# EAGLE board rtkgpio-ps (EAGLE 7.7.0)
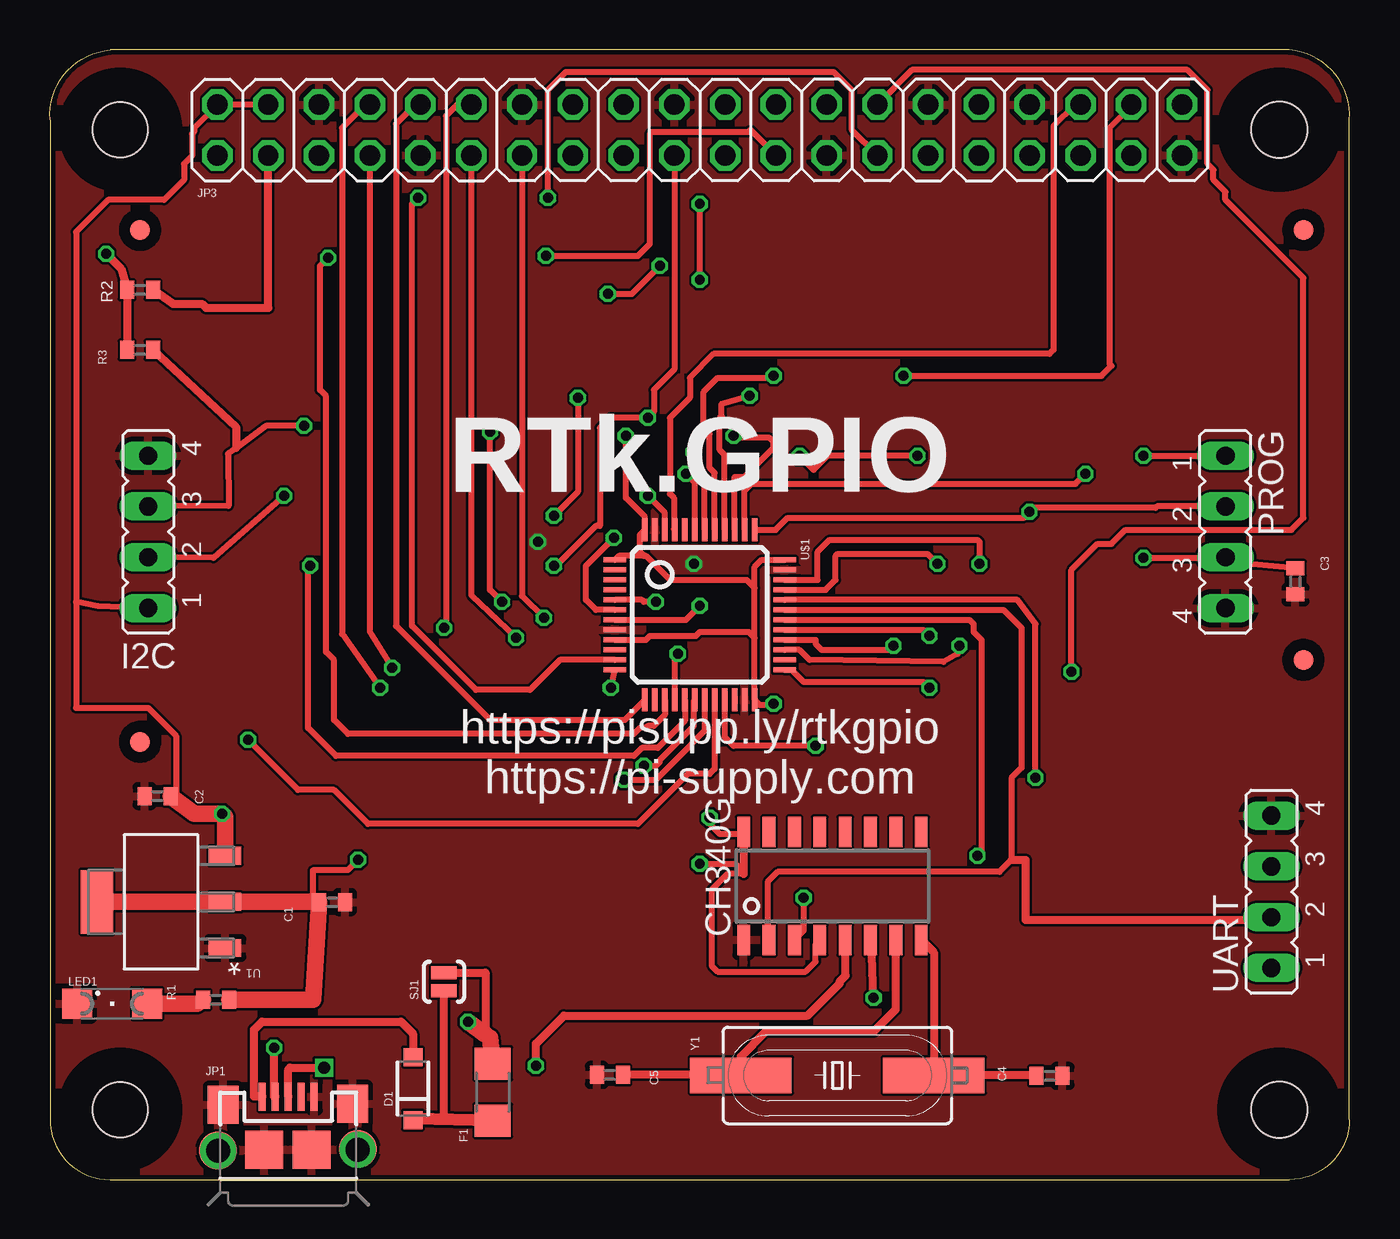
[diagram p0: board, top side]
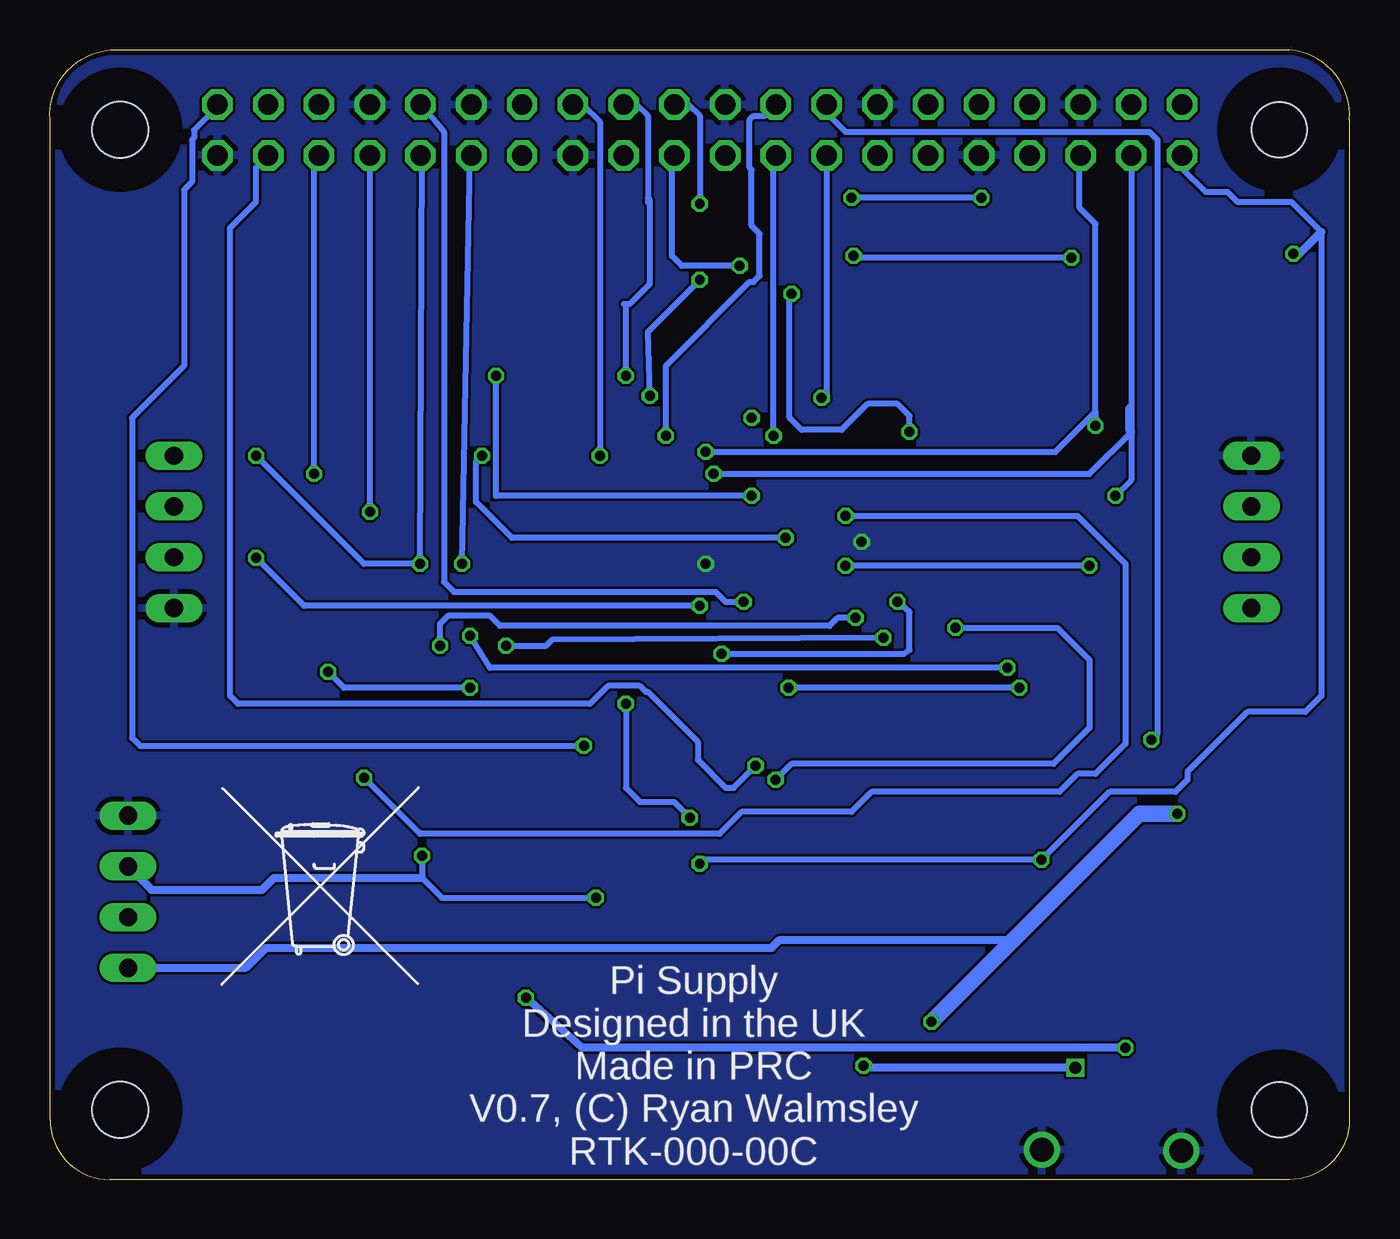
[diagram p1: board, bottom side, seen from below]

Size 65.02 x 56.5 mm. Coordinates in mm from the lower left corner, seen from the top.
Outline: 3.01,0 62.01,0 arc90 65.01,3 65.01,53 arc90 62.01,56.5 3.01,56.5 arc90 0.01,53 0.01,3 arc90 3.01,0
Copper layers (1*16): Top 0.035mm / dielectric 1.5mm / Bottom 0.035mm
Design rules "dirt_cheap_dirty_boards.v1": minimum track width 5mil, minimum drill 12mil, track to track 5mil, track to pad 5mil, pad to pad 5mil, via to via 5mil, smd to smd 0mil, copper to edge 10mil, drill to drill 10mil, minimum pad ring 10mil, minimum via ring 6mil, stop-mask expansion 2mil, vias tented up to drill 25mil, thermal gap 10mil
Holes 2.8 mm at 61.51,3.5 61.51,52.5
Holes 2.75 mm at 3.51,52.5 3.51,3.5
tRestrict: area 2,1.9 to 5.1,5; area 2,51 to 5.1,54; area 60,51 to 63.1,54; area 60,1.9 to 63.1,5; area 2,1.9 to 5.1,5
bRestrict: area 2,51 to 5.1,54; area 60,51 to 63.1,54; area 60,1.9 to 63.1,5; area 2,1.8 to 5.1,5

## Footprints (pad centres in the part's own frame; a part is rotated, then mirrored left to right if it is on the bottom)
C0402 = smd 0.7 x 0.9: 1 -0.65,0; 2 0.65,0
SOD-123 = smd 0.9 x 0.95: A 1.575,0; C -1.575,0
R1206 = smd 1.6 x 1.803: 1 -1.422,0; 2 1.422,0
JP4 = drill 0.914 long: 1 -3.81,0; 2 -1.27,0; 3 1.27,0; 4 3.81,0
USB-MICROB = smd 0.35 x 1.4: D+ 0,2.65; D- -0.65,2.65; GND 1.3,2.65; ID 0.65,2.65; VBUS -1.3,2.65 | smd 1.546 x 1.9: MT1 -3.251,2.235; MT2 3.226,2.286 | smd 1.9 x 1.9: P$1 -1.194,0; P$2 1.168,0; P$5 -3.505,-0.051; P$6 3.48,0.025 | drill 1.2 pad 1.6: P$3 -3.505,-0.051; P$4 3.48,0
2X20 = drill 1.016 octagon: 1 -24.13,-1.27; 2 -24.13,1.27; 3 -21.59,-1.27; 4 -21.59,1.27; 5 -19.05,-1.27; 6 -19.05,1.27; 7 -16.51,-1.27; 8 -16.51,1.27; 9 -13.97,-1.27; 10 -13.97,1.27; 11 -11.43,-1.27; 12 -11.43,1.27; 13 -8.89,-1.27; 14 -8.89,1.27; 15 -6.35,-1.27; 16 -6.35,1.27; 17 -3.81,-1.27; 18 -3.81,1.27; 19 -1.27,-1.27; 20 -1.27,1.27; 21 1.27,-1.27; 22 1.27,1.27; 23 3.81,-1.27; 24 3.81,1.27; 25 6.35,-1.27; 26 6.35,1.27; 27 8.89,-1.27; 28 8.89,1.27; 29 11.43,-1.27; 30 11.43,1.27; 31 13.97,-1.27; 32 13.97,1.27; 33 16.51,-1.27; 34 16.51,1.27; 35 19.05,-1.27; 36 19.05,1.27; 37 21.59,-1.27; 38 21.59,1.27; 39 24.13,-1.27; 40 24.13,1.27
SML1206 = smd 1.5 x 1.5: A 1.75,0; C -1.75,0
R0402 = smd 0.7 x 0.9: 1 -0.65,0; 2 0.65,0
SJ_2S-NO = smd 0.635 x 1.27: 1 -0.45,0; 2 0.45,0
SOT230P700X180-4N = smd 1.626 x 0.889: 1 -3.2,2.311; 2 -3.2,0; 3 -3.2,-2.311 | smd 1.626 x 3.175: 4 3.2,0
LQFP-48 = smd 0.254 x 1.143: 1 -2.75,-4.25; 2 -2.25,-4.25; 3 -1.75,-4.25; 4 -1.25,-4.25; 5 -0.75,-4.25; 6 -0.25,-4.25; 7 0.25,-4.25; 8 0.75,-4.25; 9 1.25,-4.25; 10 1.75,-4.25; 11 2.25,-4.25; 12 2.75,-4.25; 25 2.75,4.25; 26 2.25,4.25; 27 1.75,4.25; 28 1.25,4.25; 29 0.75,4.25; 30 0.25,4.25; 31 -0.25,4.25; 32 -0.75,4.25; 33 -1.25,4.25; 34 -1.75,4.25; 35 -2.25,4.25; 36 -2.75,4.25 | smd 1.143 x 0.254: 13 4.25,-2.75; 14 4.25,-2.25; 15 4.25,-1.75; 16 4.25,-1.25; 17 4.25,-0.75; 18 4.25,-0.25; 19 4.25,0.25; 20 4.25,0.75; 21 4.25,1.25; 22 4.25,1.75; 23 4.25,2.25; 24 4.25,2.75; 37 -4.25,2.75; 38 -4.25,2.25; 39 -4.25,1.75; 40 -4.25,1.25; 41 -4.25,0.75; 42 -4.25,0.25; 43 -4.25,-0.25; 44 -4.25,-0.75; 45 -4.25,-1.25; 46 -4.25,-1.75; 47 -4.25,-2.25; 48 -4.25,-2.75
FIDUCIAL-1MM = smd 1 x 1: 1 0,0
SOIC16 = smd 0.635 x 1.524: 1 -4.445,-2.695; 2 -3.175,-2.695; 3 -1.905,-2.695; 4 -0.635,-2.695; 5 0.635,-2.695; 6 1.905,-2.695; 7 3.175,-2.695; 8 4.445,-2.695; 9 4.445,2.695; 10 3.175,2.695; 11 1.905,2.695; 12 0.635,2.695; 13 -0.635,2.695; 14 -1.905,2.695; 15 -3.175,2.695; 16 -4.445,2.695
SM49 = smd 5.08 x 1.778: 1 -4.826,0; 2 4.826,0

## Placement (x,y rotation side)
C1  100nF  [C0402]  14.11,13.88 0 top
C2  100nF  [C0402]  5.38,19.18 180 top
C3  100nF  [C0402]  62.32,29.92 270 top
C4  22pF  [C0402]  50.01,5.19 0 top
C5  22pF  [C0402]  28.01,5.24 180 top
D1  B0520LW  [SOD-123]  18.16,4.55 90 top
F1  MC36211  [R1206]  22.15,4.38 90 top
I2C  [JP4]  4.91,32.4 90 top
JP1  USB-MICROB  [USB-MICROB]  11.92,1.51 0 top
JP3  [2X20]  32.51,52.5 0 top
LED1  Red  [SML1206]  3.11,8.8 0 top
PROG  [JP4]  58.81,32.4 270 top
R1  330  [R0402]  8.31,9 180 top
R2  1R8  [R0402]  4.51,44.5 0 top
R3  1R8  [R0402]  4.51,41.5 0 top
SJ1  FBP  [SJ_2S-NO]  19.71,9.9 90 top
U1  LD1117S33CTR  [SOT230P700X180-4N]  5.56,13.89 180 top
U$1  STM32F0X  [LQFP-48]  32.51,28.25 270 top
U$2  [TONNE_10.00]  51.61,12.7 0 bottom
U$5  FIDUCIAL1MM  [FIDUCIAL-1MM]  62.71,47.5 0 top
U$6  CH340G  [SOIC16]  39.15,14.68 0 top
U$7  FIDUCIAL1MM  [FIDUCIAL-1MM]  62.71,26 0 top
U$8  FIDUCIAL1MM  [FIDUCIAL-1MM]  4.51,21.9 0 top
U$9  FIDUCIAL1MM  [FIDUCIAL-1MM]  4.51,47.5 0 top
UART  [JP4]  61.11,14.4 90 top
Y1  12Mhz  [SM49]  39.39,5.22 0 top

## Library data of the parts
C1-C5 R1-R3 = resistor
D1 = SparkFun-DiscreteSemi
F1 = adafruit
I2C PROG UART = jumper
JP1 = pimoroni2
JP3 = pinhead
LED1 = led
SJ1 = SparkFun-Retired
U1 = ryanteck; MPN: LD1117S33CTR; OC_FARNELL: 2253482; OC_NEWARK: 89K0626; PACKAGE: SOT223-3; SUPPLIER: STMicroelectronics
U$1 = ryanteck
U$2 = logo
U$5 U$7-U$9 = pimoroni
U$6 = usb-serial
Y1 = adafruit; OC_FARNELL: unknown; OC_NEWARK: unknown

## Nets
+3V3: C1.1 JP3.1 JP3.17 R1.1 R2.1 R3.1 U1.2 U1.4 U$1.1 U$1.9 U$1.24 U$1.36 U$1.48 U$6.4 U$6.16
FRXD: U$1.30 U$6.3 UART.3
FTXD: U$1.31 U$6.2 UART.2
GND: C1.2 C2.2 C3.2 C4.2 C5.2 I2C.4 JP1.GND JP1.MT1 JP1.MT2 JP1.P$1 JP1.P$2 JP1.P$3 JP1.P$4 JP3.6 JP3.9 JP3.14 JP3.20 JP3.25 JP3.30 JP3.34 JP3.39 LED1.C PROG.4 U1.1 U$1.8 U$1.23 U$1.35 U$1.47 U$6.1 UART.4
GPIO0: JP3.27 U$1.11
GPIO1: JP3.28 U$1.25
GPIO2: I2C.2 JP3.3 R2.2 U$1.43
GPIO3: I2C.3 JP3.5 R3.2 U$1.42
GPIO4: JP3.7 U$1.29
GPIO5: JP3.29 U$1.33
GPIO6: JP3.31 PROG.1 U$1.34
GPIO7: JP3.26 U$1.6
GPIO8: JP3.24 U$1.41
GPIO9: JP3.21 U$1.16
GPIO10: JP3.19 U$1.17
GPIO11: JP3.23 U$1.15
GPIO12: JP3.32 U$1.5
GPIO13: JP3.33 PROG.2 U$1.37
GPIO14: JP3.8 U$1.12
GPIO15: JP3.10 U$1.13
GPIO16: JP3.36 U$1.45
GPIO17: JP3.11 U$1.28
GPIO18: JP3.12 U$1.19
GPIO19: JP3.35 U$1.38
GPIO20: JP3.38 U$1.46
GPIO21: JP3.40 U$1.21
GPIO22: JP3.15 U$1.32
GPIO23: JP3.16 U$1.20
GPIO24: JP3.18 U$1.39
GPIO25: JP3.22 U$1.40
GPIO26: JP3.37 U$1.18
GPIO27: JP3.13 U$1.27
N$1: C5.1 U$6.7 Y1.1
N$4: C4.1 U$6.8 Y1.2
N$5: LED1.A R1.2
N$6: U$1.26
N$8: U$1.22
N$10: D1.C F1.1 SJ1.1
N$11: D1.A JP1.VBUS
N$16: U$1.14
RST: C3.1 PROG.3 U$1.7
USBDM: JP1.D- U$6.6
USBDP: JP1.D+ U$6.5
VCC: C2.1 F1.2 I2C.1 JP3.2 JP3.4 SJ1.2 U1.3 UART.1

## Tracks (layer width: path | path; a pad name or v marks a point on that pad's centre or on a via)
+3V3  (via drill 0.5)
  Top 0.305: 35.26,27.1 U$1.24 35.51,23.75 36.16,23.75 v36.21,23.8 | 35.26,27.1 35.26,29.6 | 35.26,29.6 35.26,30.65 35.61,31 U$1.36 | 29.71,31.2 28.46,31.2 U$1.1 | U$1.9 29.81,27 30.01,27.2 32.31,27.2 32.51,27.4 34.96,27.4 35.26,27.1 | 13.16,13.89 13.16,15.46 13.21,15.5 14.91,15.5 v15.41,16 | v32.51,15.8 34.31,15.8 34.71,15.4 | v33.01,18.1 33.01,17.8 33.51,17.3 34.63,17.3 U$6.16 | 34.71,15.3 33.91,15.3 33.11,14.5 33.11,10.7 33.41,10.4 37.81,10.4 38.31,10.9 38.31,11.78 U$6.4 | v28.81,37.2 28.81,34.1 29.76,33.15 U$1.48 29.51,32.25 29.51,31.4 29.71,31.2 | 35.26,29.6 34.86,30 31.01,30 29.81,31.2 29.71,31.2
  Top 0.406: U$6.16 34.71,15.4 34.71,15.3 | v2.81,46.3 3.56,45.55 R2.1 R3.1
  Top 0.813: U1.4 U1.2 13.16,13.89 C1.1 13.16,9 R1.1
  Bottom 0.305: v32.51,15.8 32.31,16 v15.41,16 12.01,19.4 8.71,19.4 8.11,20 8.11,20.4 5.11,23.4 2.21,23.4 1.41,24.2 1.41,47.4 2.91,48.9 5.61,48.9 6.11,49.4 7.21,49.4 8.38,50.57 JP3.1 | v36.21,23.8 36.21,19.6 35.51,18.9 33.81,18.9 v33.01,18.1 | v28.81,37.2 28.81,51.12 JP3.17
  Bottom 0.406: 1.41,47.4 2.51,46.3 v2.81,46.3
FRXD  (via drill 0.5)
  Top 0.305: U$1.30 46.01,28 46.21,27.8 46.21,27.4 46.61,27 46.61,16.4 v46.41,16.2 | v37.71,14.1 37.71,12.45 U$6.3
  Bottom 0.305: v46.41,16.2 46.41,15.1 45.41,14.1 v37.71,14.1
  Bottom 0.406: UART.3 59.94,14.5 54.41,14.5 53.81,15.1 46.41,15.1
FTXD
  Top 0.305: U$1.31 47.71,28.5 48.61,27.6 48.61,20.6 48.11,20.1 48.11,16 47.51,15.4 36.41,15.4 35.91,14.9 35.91,12.05 U$6.2
  Top 0.406: 48.11,16 48.81,16 48.81,13 61.11,13 UART.2
GND  (via drill 0.5)
  other vias: 24.41,31.9 32.21,30.8
  pour Top: -0.99,-1 -0.99,59 66.51,59.1 68.01,-4.1 4.71,-5.3
  pour Bottom: -0.99,-6.8 -0.99,58 68.01,58 68.41,-4.8
GPIO0  (via drill 0.5)
  Top 0.305: U$1.11 25.51,26 24.01,24.5 21.31,24.5 18.11,27.7 18.11,48.8 v18.41,49.1 | JP3.27 40.11,52.52 40.11,54.5 39.21,55.4 25.81,55.4 24.91,54.5 v24.91,49.1
  Bottom 0.305: v18.41,49.1 v24.91,49.1
GPIO1  (via drill 0.5)
  Top 0.305: U$1.25 37.11,25.5 37.71,24.9 43.71,24.9 v44.01,24.6 | v51.11,25.4 51.11,30.5 52.41,31.8 53.11,31.8 53.81,32.5 62.11,32.5 62.71,33.1 62.71,45.1 58.81,49 58.81,49.4 58.21,50 58.21,50.5 57.91,50.8 57.91,54.5 56.91,55.5 43.13,55.5 JP3.28
  Bottom 0.305: v44.01,24.6 50.31,24.6 v51.11,25.4
GPIO2  (via drill 0.5)
  Top 0.305: U$1.43 32.26,34.85 v31.81,35.3 | v11.71,34.2 8.18,31.1 I2C.2
  Top 0.406: R2.2 6.16,43.8 7.61,43.8 7.81,43.6 10.92,43.6 JP3.3
  Bottom 0.305: JP3.3 10.92,37.39 | 10.92,37.39 13.01,35.3 v31.81,35.3 | 10.92,37.39 10.92,34.99 v11.71,34.2
  Bottom 0.406: 10.92,37.39 11.01,37.48 11.01,38.6
GPIO3  (via drill 0.5)
  Top 0.305: U$1.42 32.76,35.05 32.61,35.4 v32.21,36.4 | v12.71,37.7 10.81,37.7 9.31,36.59 8.91,36.3 8.94,33.7 I2C.3
  Top 0.406: R3.2 9.31,37.65 9.31,36.59
  Bottom 0.305: v32.21,36.4 14.71,36.4 12.71,38.4 | 12.71,38.4 12.71,47.8 13.51,48.6 13.51,51.18 JP3.5 | 12.71,38.4 v12.71,37.7
GPIO4  (via drill 0.5)
  Top 0.305: JP3.7 16,27.41 v17.11,25.6 | U$1.29 43.71,27.5 v44.01,27.2
  Bottom 0.305: v17.11,25.6 43.01,25.6 v44.01,27.2
GPIO5  (via drill 0.5)
  Top 0.305: U$1.33 38.81,29.5 39.31,30 39.31,31.2 39.41,31.3 43.91,31.3 v44.41,30.8
  Bottom 0.305: v44.41,30.8 44.01,51.16 JP3.29
GPIO6  (via drill 0.5)
  Top 0.305: U$1.34 38.41,30 38.41,31.4 39.01,32 46.41,32 46.5,31.9 v46.5,30.8 v46.51,30.8 | v54.71,36.2 PROG.1
  Bottom 0.305: JP3.31 46.41,51.16 v46.51,30.8 49.31,30.8 v54.71,36.2
GPIO7  (via drill 0.5)
  Top 0.305: U$1.6 27.31,28.5 26.81,29 26.81,30.7 v28.21,32.1 | v43.41,36.2 38.91,36.2 38.21,35.5 v37.51,36.2
  Bottom 0.305: JP3.26 38.38,53.77 37.51,52.9 37.51,36.4 v37.51,36.2 | v28.21,32.1 41.91,32.1 43.71,33.9 43.71,35.9 v43.41,36.2
GPIO8  (via drill 0.5)
  Top 0.305: U$1.41 33.26,35.35 33.01,35.6 33.01,37.3 32.71,37.6 32.71,39.4 33.41,40.1 36.11,40.1 v36.21,40.2
  Bottom 0.305: JP3.24 35.68,53.77 35.11,53.2 35.11,49.1 | 35.11,49.1 35.11,48.9 | v36.21,40.2 36.21,43.7 36.31,43.8 36.01,43.8 35.01,44.8 35.01,49 35.11,49.1
GPIO9  (via drill 0.5)
  Top 0.305: U$1.16 31.26,26.05 v31.41,26.3 | v22.01,37.4 22.01,29.5 v22.61,28.9 | v27.91,44.3 29.11,44.3 v30.51,45.7
  Bottom 0.305: v22.01,37.4 22.01,38.2 22.61,38.8 24.11,38.8 25.41,37.5 27.41,37.5 28.01,38.1 28.01,44.2 v27.91,44.3 | v30.51,45.7 33.41,45.7 33.91,46.2 33.91,51.1 JP3.21 | v31.41,26.3 22.31,26.3 22.01,26.5 22.01,28.4 v22.61,28.9
GPIO10  (via drill 0.5)
  Top 0.305: JP3.19 31.24,40.53 30.21,39.5 30.21,38.4 v29.91,38.1 28.01,38.1 27.51,37.6 27.51,32.7 27.31,32.7 25.31,30.7 v25.21,30.7 | U$1.17 31.76,22.95 30.41,21.6 29.61,21.6 29.21,21.2 14.31,21.2 12.91,22.6 12.91,30.6 v13.01,30.7
  Bottom 0.305: v13.01,30.7 v25.21,30.7
GPIO11  (via drill 0.5)
  Top 0.305: U$1.15 30.76,23.25 30.21,22.7 29.91,22.7 29.81,22.6 29.51,22.6 29.21,22.3 14.91,22.3 14.21,23 14.21,26 13.81,26.4 13.81,39.2 13.51,39.5 13.51,45.7 v13.91,46.1 | JP3.23 35.05,52.5 34.95,52.4 30.11,52.4 30.01,52.3 30.01,46.8 29.41,46.2 v24.81,46.2
  Bottom 0.305: v13.91,46.1 24.71,46.1 v24.81,46.2
GPIO12  (via drill 0.5)
  Top 0.305: v30.31,28.9 29.71,28.9 29.61,29 U$1.5
  Bottom 0.305: v30.31,28.9 31.21,28.9 31.71,29.4 44.81,29.4 45.31,29.9 45.31,52.4 45.68,52.87 JP3.32
GPIO13  (via drill 0.5)
  Top 0.305: U$1.37 36.31,32.5 36.91,33.1 48.71,33.1 v49.01,33.4 49.21,33.6 55.31,33.6 55.38,33.67 PROG.2
  Bottom 0.305: v49.01,33.4 JP3.33
GPIO14  (via drill 0.5)
  Top 0.305: JP3.8 15.78,53.77 14.61,52.6 14.61,27.3 v16.51,24.6 | v28.06,24.6 U$1.12
  Bottom 0.305: v16.51,24.6 v28.06,24.6
GPIO15
  Top 0.305: JP3.10 18.28,53.77 17.31,52.8 17.31,27.7 22.01,23 28.76,23 U$1.13
GPIO16
  Top 0.305: JP3.36 51.28,53.77 50.21,52.7 50.21,41.5 50.01,41.3 33.21,41.3 32.01,40.1 32.01,39.1 31.01,38.1 31.01,34.3 31.21,34.1 31.21,32.55 U$1.45
GPIO17  (via drill 0.5)
  Top 0.305: JP3.11 21.08,29.23 v23.31,27.1 | U$1.28 38.31,27 38.31,26.8 38.61,26.5 42.11,26.5 v42.21,26.7
  Bottom 0.305: v23.31,27.1 39.91,27 40.21,26.7 v42.21,26.7
GPIO18  (via drill 0.5)
  Top 0.305: U$1.19 32.76,22.45 31.41,21.1 31.21,20.9 30.31,20 v28.71,20 | JP3.12 20.38,53.77 19.81,53.2 19.81,27.7 v19.71,27.6
  Bottom 0.305: v19.71,27.6 14.61,27.6 13.01,26 13.01,22.6 14.81,20.8 27.91,20.8 v28.71,20
GPIO19  (via drill 0.5)
  Top 0.305: U$1.38 34.76,34.45 35.11,34.8 51.31,34.8 v51.81,35.3
  Bottom 0.305: v51.81,35.3 51.81,50.72 JP3.35
GPIO20  (via drill 0.5)
  Top 0.305: JP3.38 54.1,53.69 53.01,52.6 53.01,40.8 53.11,40.7 52.61,40.2 v42.71,40.2 | U$1.46 30.76,33.35 v29.91,34.2
  Bottom 0.305: v29.91,34.2 42.71,34.2 v42.71,40.2
GPIO21  (via drill 0.5)
  Top 0.305: U$1.21 33.76,22.15 34.21,21.7 v38.31,21.7
  Bottom 0.305: JP3.40 56.64,53.67 57.81,52.5 57.81,52.1 57.91,52 57.91,49.9 58.31,49.5 58.31,40.7 60.91,38.1 60.91,22.1 60.51,21.7 v38.31,21.7
GPIO22  (via drill 0.5)
  Top 0.305: v26.41,39.1 26.41,34.4 v25.21,33.2 | v49.31,20.1 49.31,27.8 48.41,29 U$1.32
  Bottom 0.305: JP3.15 26.16,39.35 v26.41,39.1 | v25.21,33.2 13.61,33.2 11.21,30.8 11.21,21.8 12.71,20.3 13.61,20.3 14.51,19.4 23.91,19.4 24.91,18.4 30.41,18.4 31.51,17.3 46.51,17.3 v49.31,20.1
GPIO23  (via drill 0.5)
  Top 0.305: U$1.20 33.26,20.55 33.01,20.3 31.91,20.3 29.41,17.8 15.91,17.8 14.21,19.5 12.41,19.5 v9.91,22
  Bottom 0.305: JP3.16 26.16,53.35 25.21,52.4 10.01,52.4 9.61,52 9.61,22.3 v9.91,22 9.96,21.95 10.11,21.8
GPIO24  (via drill 0.5)
  Top 0.305: U$1.39 34.26,35.15 34.76,35.15 36.21,36.6 36.21,36.9 36.01,37.1 34.31,37.1 v34.21,37.2
  Bottom 0.305: v34.21,37.2 34.21,40.7 30.01,44.9 29.81,44.9 29.51,45.2 29.51,47.3 29.91,47.7 29.91,50.5 30.01,50.6 30.01,53 29.81,53.2 29.27,53.2 JP3.18
GPIO25  (via drill 0.5)
  Top 0.305: U$1.40 33.76,36.25 33.51,36.5 33.51,38.1 33.61,38.2 33.61,38.8 v35.01,39.2 | v32.51,45 v32.51,48.8
  Bottom 0.305: JP3.22 33.08,53.77 32.51,53.2 v32.51,48.8 | v35.01,39.2 35.11,42.4 v32.51,45
GPIO26  (via drill 0.5)
  Top 0.305: v29.71,20.7 30.31,20.7 30.51,20.9 30.51,21 32.21,22.7 32.21,23.95 U$1.18
  Bottom 0.305: JP3.37 54.71,50.62 54.71,48.9 56.01,47.6 56.01,24.2 55.61,23.8 38.01,23.8 37.11,24.7 35.51,24.7 35.21,24.4 35.11,24.4 32.61,21.9 32.61,21 31.21,19.6 30.81,19.6 v29.71,20.7
GPIO27  (via drill 0.5)
  Top 0.305: JP3.13 23.62,29.19 v24.71,28.1 | v45.51,26.7 45.41,26.3 44.71,25.9 38.01,26 37.51,26.5 U$1.27
  Bottom 0.305: v45.51,26.7 45.51,27.8 45.11,28.2 43.01,28.2 42.51,27.7 26.01,27.7 25.61,28.1 v24.71,28.1
N$1
  Top 0.406: C5.1 34.54,5.24 Y1.1 34.57,6.16 35.81,7.4 41.21,7.4 42.31,8.5 42.31,11.97 U$6.7
N$4
  Top 0.406: C4.1 49.03,5.22 Y1.2 44.22,11.36 U$6.8
N$5
  Top 0.813: LED1.A 7.36,8.8 R1.2
N$10
  Top 0.406: D1.C 19.71,2.98 SJ1.1
  Top 0.61: F1.1 18.24,3.06 D1.C
N$11
  Top 0.406: JP1.VBUS 10.21,4.16 10.21,7.5 10.61,7.9 17.56,7.9 18.16,7.3 D1.A
RST  (via drill 0.5)
  Top 0.305: C3.1 59.07,30.87 PROG.3 58.78,31.1 v54.71,31.1 | U$1.7 31.81,28 v32.51,28.7
  Bottom 0.305: v32.51,28.7 52.31,28.7 v54.71,31.1
USBDM  (via drill 0.5)
  Top 0.406: JP1.D- 11.21,4.16 v11.21,6.6 | v41.21,9.1 41.11,11.93 U$6.6
  Bottom 0.406: v11.21,6.6 38.41,6.6 v41.21,9.1
USBDP  (via drill 0.5, 0.6)
  Top 0.406: JP1.D+ 11.92,5.51 12.01,5.6 v13.71,5.6 | v24.31,5.7 24.31,6.8 25.71,8.2 37.91,8.2 39.51,9.8 39.51,9.9 39.81,10.2 39.81,11.96 U$6.5
  Bottom 0.406: v13.71,5.6 24.21,5.6 v24.31,5.7
VCC  (via drill 0.5)
  Top 0.305: JP3.4 JP3.2 7.21,52.6 7.21,52.4 7.11,52.3 7.11,51.2 6.71,50.8 6.71,50 5.71,49 2.91,49 1.31,47.4 1.31,28.9 | 1.31,28.9 1.31,23.6 4.91,23.6 6.31,22.2 6.31,19.2 C2.1 | I2C.1 2.4,28.69 1.31,28.9
  Top 0.406: SJ1.2 21.79,10.35 21.79,7.26
  Top 0.813: F1.2 22.01,7.1 21.79,7.26 v20.91,7.9 | U1.3 8.76,18.15 v8.61,18.3 7.21,18.3 C2.1
  Bottom 0.406: UART.1 55.21,10.6 54.21,11.6 28.91,11.6 28.51,12 16.81,12
  Bottom 0.813: v20.91,7.9 16.81,12 10.51,18.3 v8.61,18.3

## Text on the board
tNames: RTk.GPIO | https://pisupp.ly/rtkgpio / https://pi-supply.com
bNames: Pi Supply / Designed in the UK / Made in PRC / V0.7, (C) Ryan Walmsley / RTK-000-00C
tValues: 5V | 5V | GND | GP14 | GP15 | GP18 | GND | GP23 | GP24 | GND | GP25 | GP8 | GP7 | GP1 | GND | GP12 | GND | GP16 | GP20 | GP21 | 3v3 | GP2 | GP3 | GP4 | GND | GP17 | GP27 | GP22 | 3v3 | GP10 | GP9 | GP11 | GND | GP0 | GP5 | GP6 | GP13 | GP19 | GP26 | GND | GND | SCL | SDA | 5V